# EAGLE board dozer.mover (EAGLE 6.4)
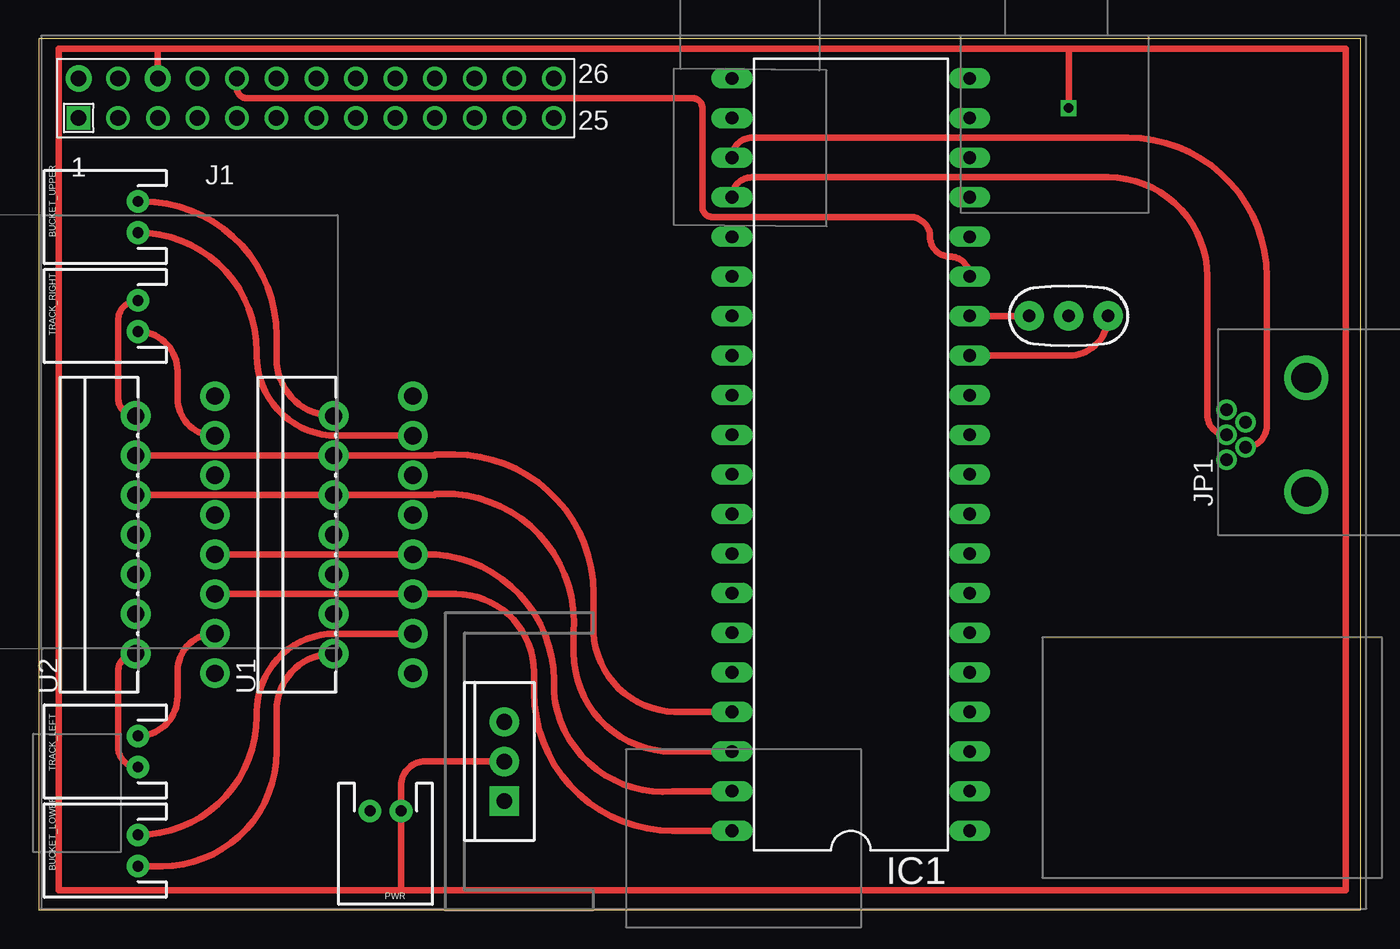
[diagram p0: board, top side]
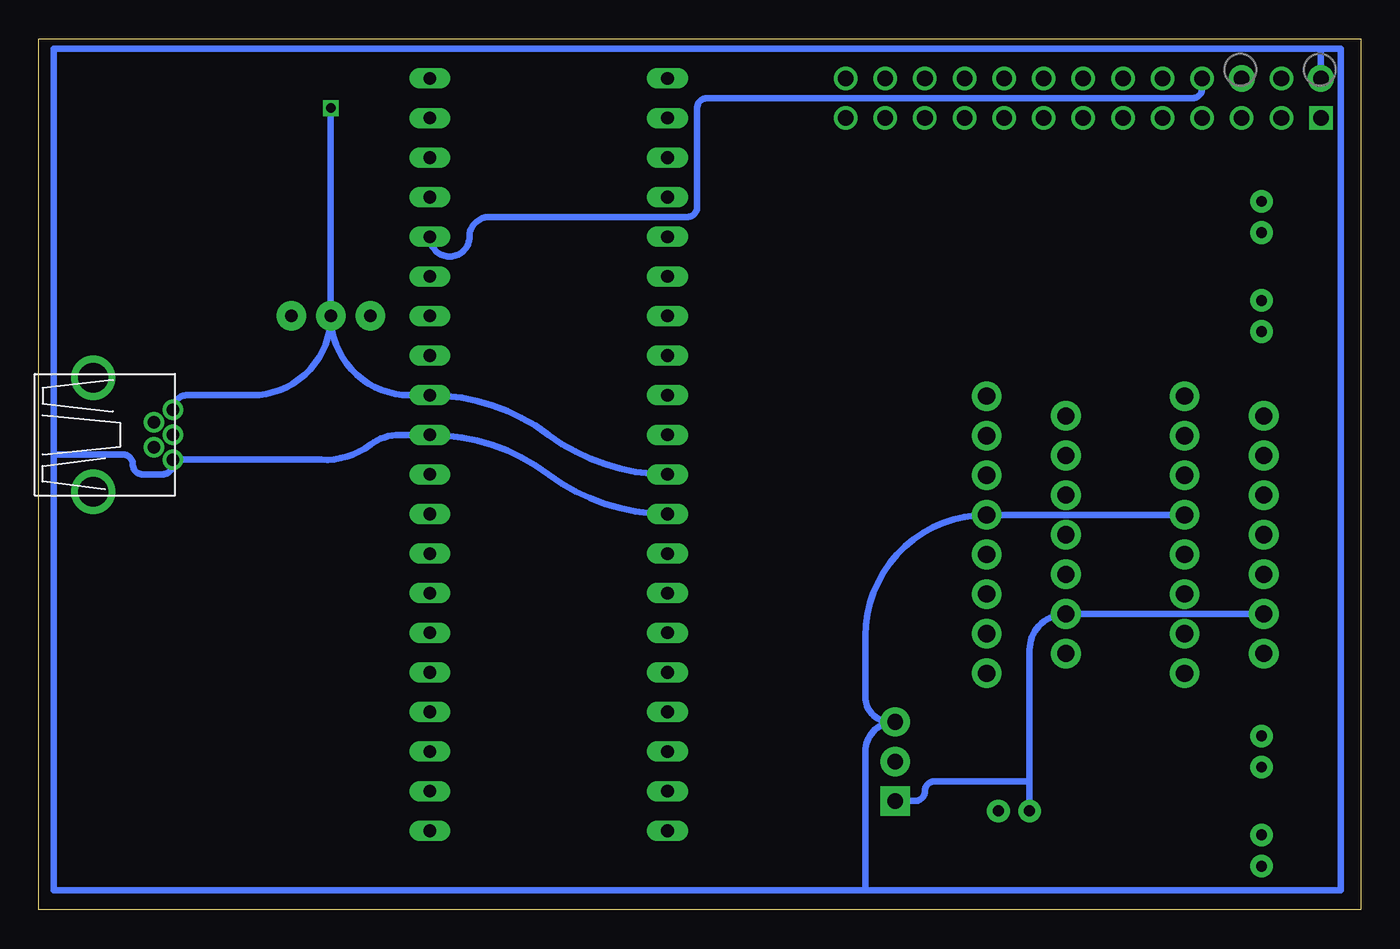
[diagram p1: board, bottom side, seen from below]

Size 84.76 x 55.87 mm. Coordinates in mm from the lower left corner, seen from the top.
Outline: 0,0 84.76,0 84.76,55.87 0,55.87 0,0
Copper layers (1*16): Top 0.035mm / dielectric 1.5mm / Bottom 0.035mm
Design rules "default": minimum track width 10mil, minimum drill 24mil, track to track 8mil, track to pad 8mil, pad to pad 8mil, via to via 8mil, smd to smd 8mil, copper to edge 40mil, drill to drill 8mil, minimum pad ring 10mil, minimum via ring 8mil, stop-mask expansion 4mil, vias tented up to drill 0mil, thermal gap 10mil

## Footprints (pad centres in the part's own frame; a part is rotated, then mirrored left to right if it is on the bottom)
JST-2-PTH = drill 0.7 pad 1.448: 1 -1,0; 2 1,0
DIL40 = drill 0.813 long: 1 -24.13,-7.62; 2 -21.59,-7.62; 3 -19.05,-7.62; 4 -16.51,-7.62; 5 -13.97,-7.62; 6 -11.43,-7.62; 7 -8.89,-7.62; 8 -6.35,-7.62; 9 -3.81,-7.62; 10 -1.27,-7.62; 11 1.27,-7.62; 12 3.81,-7.62; 13 6.35,-7.62; 14 8.89,-7.62; 15 11.43,-7.62; 16 13.97,-7.62; 17 16.51,-7.62; 18 19.05,-7.62; 19 21.59,-7.62; 20 24.13,-7.62; 21 24.13,7.62; 22 21.59,7.62; 23 19.05,7.62; 24 16.51,7.62; 25 13.97,7.62; 26 11.43,7.62; 27 8.89,7.62; 28 6.35,7.62; 29 3.81,7.62; 30 1.27,7.62; 31 -1.27,7.62; 32 -3.81,7.62; 33 -6.35,7.62; 34 -8.89,7.62; 35 -11.43,7.62; 36 -13.97,7.62; 37 -16.51,7.62; 38 -19.05,7.62; 39 -21.59,7.62; 40 -24.13,7.62
TO220-IGO = drill 1 pad 1.88: GND 0,0; OUT 2.54,0 | drill 1 pad 1.88 square: IN -2.54,0
RASPBERRY-PI = drill 1 square: 1 0,0 | drill 1 pad 1.676: 2 0,2.54; 6 5.08,2.54 | drill 1: 3 2.54,0; 4 2.54,2.54; 5 5.08,0; 7 7.62,0; 8 7.62,2.54; 9 10.16,0; 10 10.16,2.54; 11 12.7,0; 12 12.7,2.54; 13 15.24,0; 14 15.24,2.54; 15 17.78,0; 16 17.78,2.54; 17 20.32,0; 18 20.32,2.54; 19 22.86,0; 20 22.86,2.54; 21 25.4,0; 22 25.4,2.54; 23 27.94,0; 24 27.94,2.54; 25 30.48,0; 26 30.48,2.54
USB-MB-H = drill 0.8: D+ 5.1,0; D- 3.9,0.8; GND 5.1,-1.6; ID 3.9,-0.8; VBUS 5.1,1.6 | drill 1.9: P$6 0,-3.65; P$7 0,3.65
MULTIWATT15 = drill 1.1 pad 1.9: 1 -8.95,-2.39; 2 -7.68,2.69; 3 -6.41,-2.39; 4 -5.14,2.69; 5 -3.87,-2.39; 6 -2.6,2.69; 7 -1.33,-2.39; 8 -0.06,2.69; 9 1.21,-2.39; 10 2.48,2.69; 11 3.75,-2.39; 12 5.02,2.69; 13 6.29,-2.39; 14 7.56,2.69; 15 8.83,-2.39
RESONATOR-PTH = drill 0.8 pad 1.88: 1 -2.54,0; 2 0,0; 3 2.54,0

## Placement (x,y rotation side)
BUCKET_LOWER  [JST-2-PTH]  6.35,3.81 90 top
BUCKET_UPPER  [JST-2-PTH]  6.35,44.45 90 top
IC1  PIC18F4550_40  [DIL40]  52.07,29.21 90 top
IC2  [TO220-IGO]  29.84,9.53 90 top
J1  [RASPBERRY-PI]  2.54,50.8 0 top
JP1  USB-MB-H  [USB-MB-H]  81.28,30.48 180 top
PWR  [JST-2-PTH]  22.23,6.35 180 top
TRACK_LEFT  [JST-2-PTH]  6.35,10.16 90 top
TRACK_RIGHT  [JST-2-PTH]  6.35,38.1 90 top
U1  L298  [MULTIWATT15]  21.59,24.13 90 top
U2  L298  [MULTIWATT15]  8.89,24.13 90 top
Y1  [RESONATOR-PTH]  66.04,38.1 0 top

## Library data of the parts
BUCKET_LOWER BUCKET_UPPER JP1 PWR TRACK_LEFT TRACK_RIGHT = SparkFun-Connectors
IC1 = microchip; MF: MICROCHIP; MPN: PIC18F4550-I/P; OC_FARNELL: 9321357; OC_NEWARK: 74K8623
IC2 U1 U2 = SparkFun-PowerIC
J1 = RaspberryPi
Y1 = SparkFun-FreqCtrl

## Nets
5VDC: IC1.11 IC1.32 IC2.OUT J1.2 JP1.VBUS U1.9 U2.9
BKTL+: BUCKET_LOWER.1 U1.2
BKTL-: BUCKET_LOWER.2 U1.3
BKTU+: BUCKET_UPPER.1 U1.13
BKTU-: BUCKET_UPPER.2 U1.14
CHAN1+: IC1.40 U1.5 U2.5
CHAN1-: IC1.39 U1.7 U2.7
CHAN2+: IC1.38 U1.10 U2.10
CHAN2-: IC1.37 U1.12 U2.12
GND: IC1.12 IC1.31 IC2.GND J1.6 JP1.GND PWR.1 Y1.2
N$1: U1.8
N$2: U2.8
N$7: IC1.36
N$8: IC1.35
N$9: IC1.34
N$10: IC1.33
N$19: U1.11
N$20: U1.6
N$23: U1.1
N$24: U1.15
N$25: U2.15
N$26: U2.1
N$27: U2.11
N$28: U2.6
OSC1: IC1.13 Y1.3
OSC2: IC1.14 Y1.1
TRKL+: TRACK_LEFT.1 U2.2
TRKL-: TRACK_LEFT.2 U2.3
TRKR+: TRACK_RIGHT.1 U2.13
TRKR-: TRACK_RIGHT.2 U2.14
UARTRX: IC1.15 J1.10
UARTTX: IC1.16 J1.8
USB+: IC1.24 JP1.D+
USB-: IC1.23 JP1.D-
V_RAW: IC2.IN PWR.2 U1.4 U2.4

## Tracks (layer width: path | path; a pad name or v marks a point on that pad's centre or on a via)
5VDC
  Bottom 0.406: J1.2 2.54,55.24 | 2.54,55.24 83.82,55.24 83.82,29.21 | 83.82,29.21 83.82,1.27 31.75,1.27 | 31.75,1.27 1.27,1.27 1.27,55.24 2.54,55.24 | IC1.32 arc37 52.07,27.94 arc-37 IC1.11 61.59,30.48 arc-37 63.5,29.84 arc40 66.67,28.88 JP1.VBUS 76.18,28.59 arc90 76.83,27.94 78.11,27.94 arc90 78.74,28.57 arc-90 79.38,29.21 83.82,29.21 | 31.75,1.27 31.75,10.16 arc90 IC2.OUT 30.16,12.06 arc90 31.75,13.65 31.75,17.57 arc90 U1.9 U2.9
BKTL+
  Top 0.406: BUCKET_LOWER.1 7.89,2.81 arc90 15.24,10.16 15.24,12.79 arc-90 U1.2
BKTL-
  Top 0.406: U1.3 18.99,17.72 arc90 13.97,12.7 13.97,12.43 arc-90 BUCKET_LOWER.2
BKTU+
  Top 0.406: U1.13 19.11,30.42 arc-90 13.97,35.56 13.97,35.83 arc90 BUCKET_UPPER.1
BKTU-
  Top 0.406: BUCKET_UPPER.2 6.62,45.45 arc-90 15.24,36.83 15.24,35.35 arc90 U1.14
CHAN1+
  Top 0.406: U2.5 U1.5 26.73,20.26 arc-90 31.75,15.24 31.75,13.97 arc90 40.64,5.08 IC1.40
CHAN1-
  Top 0.406: U2.7 U1.7 25.46,22.8 arc-90 33.02,13.97 arc90 40.64,7.62 IC1.39
CHAN2+
  Top 0.406: U2.10 U1.10 25.34,26.61 arc90 25.4,26.67 26.67,26.67 arc-90 34.29,17.78 34.29,16.51 arc90 40.64,10.16 IC1.38
CHAN2-
  Top 0.406: U2.12 U1.12 25.34,29.15 arc90 25.4,29.21 26.67,29.21 arc-90 35.56,20.32 35.56,17.78 arc90 41.27,12.7 IC1.37
GND  (via drill 0.6)
  Top 0.406: J1.6 7.62,55.24 | 7.62,55.24 66.04,55.24 | 66.04,55.24 83.82,55.24 83.82,1.27 23.23,1.27 | 23.23,1.27 1.27,1.27 1.27,55.24 7.62,55.24 | v66.04,51.44 66.04,55.24 | 23.23,1.27 PWR.1 23.23,7.99 arc-90 24.77,9.53 IC2.GND
  Bottom 0.406: IC1.31 arc37 52.07,30.48 arc-37 IC1.12 60.96,33.02 arc90 Y1.2 | Y1.2 arc90 71.12,33.02 75.24,33.02 arc-90 JP1.GND | v66.04,51.44 Y1.2
OSC1
  Top 0.406: IC1.13 66.04,35.56 arc90 Y1.3
OSC2
  Top 0.406: IC1.14 Y1.1
TRKL+
  Top 0.406: TRACK_LEFT.1 arc-90 5.08,10.43 5.08,15.33 arc-90 U2.2
TRKL-
  Top 0.406: TRACK_LEFT.2 arc90 8.89,13.7 8.89,15.33 arc-90 U2.3
TRKR+
  Top 0.406: TRACK_RIGHT.1 arc-90 8.89,34.56 8.89,32.81 arc90 U2.13
TRKR-
  Top 0.406: U2.14 arc-90 5.08,32.81 5.08,37.83 arc-90 TRACK_RIGHT.2
UARTRX
  Top 0.406: IC1.15 arc90 58.42,41.91 arc-90 57.15,43.18 arc90 55.88,44.45 43.18,44.45 arc-90 42.55,45.09 42.55,51.44 arc90 41.91,52.07 13.34,52.07 arc-90 12.7,52.7 J1.10
UARTTX
  Bottom 0.406: J1.8 10.16,52.7 arc90 10.79,52.07 41.91,52.07 arc-90 42.55,51.44 42.55,45.09 arc90 43.18,44.45 55.88,44.45 arc-90 57.15,43.18 arc90 58.42,41.91 arc90 IC1.16
USB+
  Top 0.406: JP1.D+ arc-89 74.93,31.75 74.93,40.64 arc90 68.58,46.99 45.72,46.99 arc90 IC1.24
USB-
  Top 0.406: JP1.D- arc90 78.74,31.04 78.74,40.64 arc90 69.85,49.53 45.72,49.53 arc90 IC1.23
V_RAW
  Bottom 0.406: PWR.2 21.23,8.26 | 21.23,8.26 21.23,16.66 arc90 U1.4 U2.4 | IC2.IN 28.57,6.99 arc-90 27.94,7.62 arc90 27.3,8.26 21.23,8.26